# Altium PCB 2018_ACU_LVPWR_rev0.PcbDoc
Units mil, origin at the board's own origin, x right, y up, seen from the top; angles counter-clockwise.
Board outline 7030 x 2760 mil, 2 copper layers (Top Layer, Bottom Layer); 87 components, 73 nets, 303 pads, 254 vias.
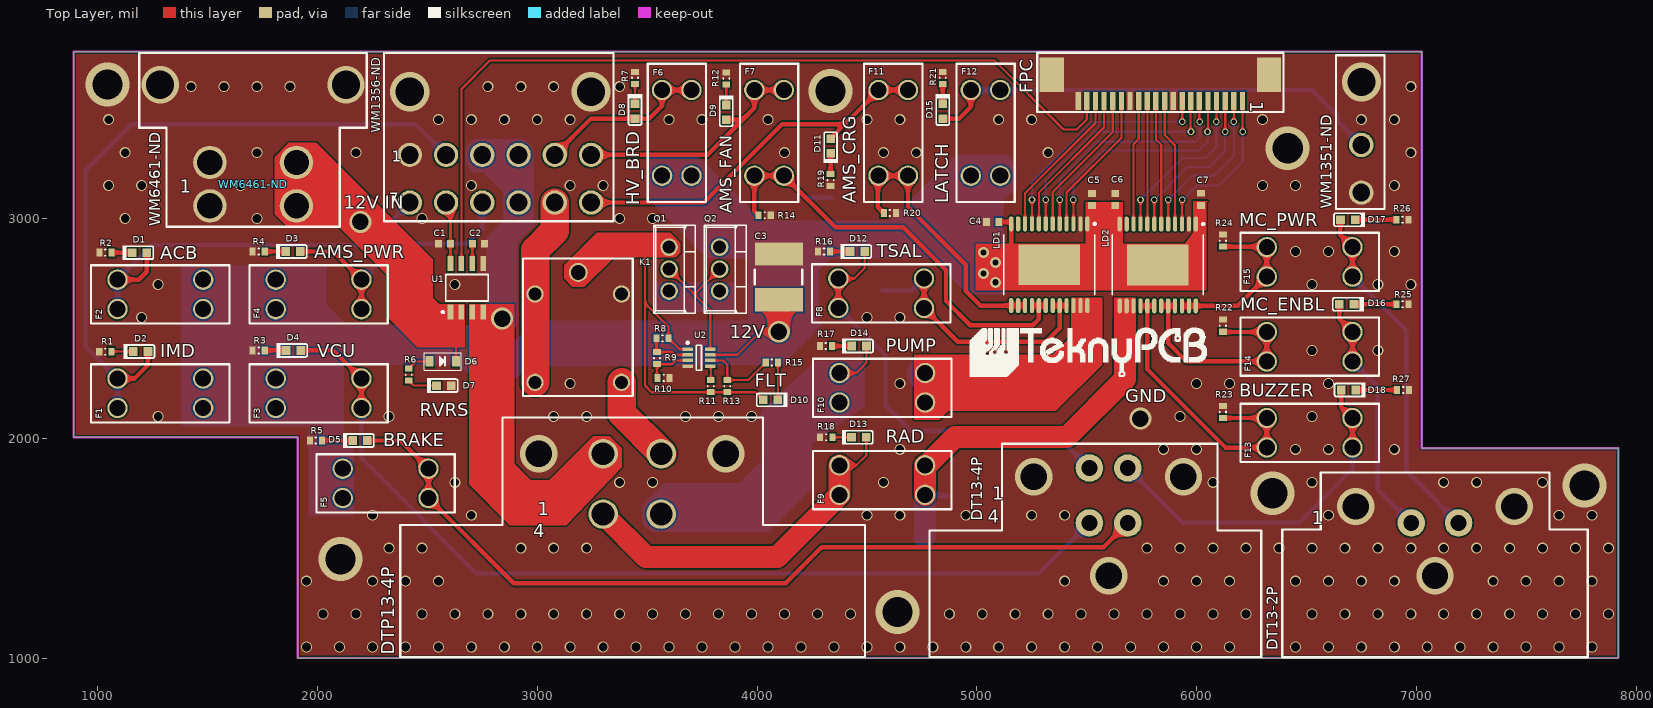
[diagram p0: Top Layer view]
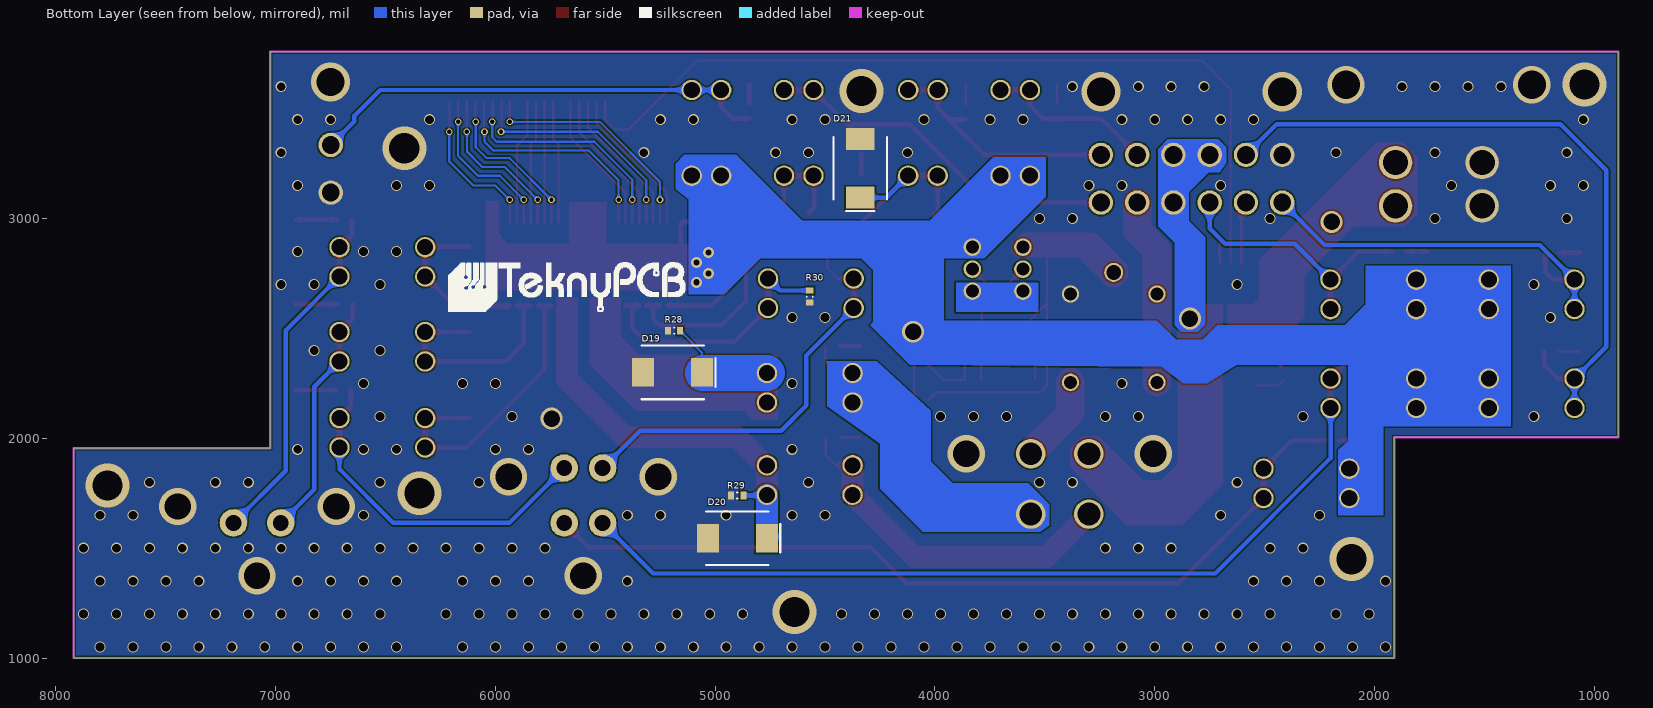
[diagram p1: Bottom Layer view, seen from below]

## Layer stack, top to bottom
Top Solder: solder mask 0.4, Solder Resist, Dk 3.5
Top Layer: signal copper 1.4
Dielectric 1: dielectric 12.6, FR-4, Dk 4.8
Bottom Layer: signal copper 1.4
Bottom Solder: solder mask 0.4, Solder Resist, Dk 3.5

## Board outline
890,3760 7025,3760 7025,1955 7920,1955 7920,1000 1910,1000 1910,2005 890,2005

## Design rules (kind name [scope] priority, off if disabled: settings)
Clearance [All] p1: gap=7
Height [All] p1: minheight=0 maxheight=82934.17 prefheight=500
HoleSize [All] p1: absolutevalues=TRUE maxlimit=200 minlimit=15 maxpercent=80.000 minpercent=20.000
HoleToHoleClearance [All] p1: gap=8 allowstackedmicrovias=TRUE
MinimumAnnularRing MinimumAnnularRing_Pad [IsPad] p1: minimumring=7
MinimumAnnularRing MinimumAnnularRing_Via [IsVia] p2: minimumring=5
MinimumSolderMaskSliver [All] p1: minsoldermaskwidth=4
PlaneClearance [All] p1: clearance=15
PlaneConnect PlaneConnect_12V [InNet('12V')] p1: planeconnectstyle=Direct reliefexpansion=20 reliefentries=4 reliefconductorwidth=20 reliefairgap=10
PlaneConnect PlaneConnect_1 [All] p2: planeconnectstyle=Relief reliefexpansion=15 reliefentries=4 reliefconductorwidth=15 reliefairgap=10
PolygonConnect [All] p1: connectstyle=Direct reliefconductorwidth=15 reliefentries=4 polygonreliefangle="90 Angle" airgapwidth=10
RoutingVias [All] p1: holewidth=17 width=31 viastyle="Through Hole" minholewidth=15 minwidth=29 maxholewidth=50 maxwidth=100
SilkToSilkClearance [All] p1: silktosilkclearance=7
SilkToSolderMaskClearance [IsPad] p1: minsilkscreentomaskgap=2 clearancetoexposedcopper=TRUE
SolderMaskExpansion [All] p1: expansion=3
UnpouredPolygon UnpouredPolygon_1 [All] p2:
Width [All] p1: maxlimit=200 minlimit=7 preferedwidth=15
22 further rules are at their usual default settings.

## Classes and differential pairs
component class Sheet1: DT1 DT2 DT13-2P DT13-4P DTP1 DTP13-4P FPC WM1 WM1351-ND WM1356-ND
component class Sheet2: C2 C5 C6 D1 D2 D10 D17 D19 D20 K1 Q1 Q2 R6 R9 R10 R11 R13 R15 R20 U1 U2
component class Sheet4: C1 C2 C3 C4 D5 D17 D19 D20 D21 LD1 LD2 R5 R12 R14 R20 R22 R23 R25 R29
component class Sheet5: D1 D2 D8 D9 D10 D11 D12 D13 D14 D15 D16 D17 D18 D19 D20 F1 F2 F3 F4 F5 F6 F7 F8 F9 F10 F11 F12 F13 F14 F15 R1 R4 R5 R12 R14 R16 R17 R18 R19 R21 R22 R23 R25 R26 R27

## Components (designator, comment, footprint, x,y, rotation, side; value= is the part's Value field where it differs from the comment)
C1 "Cap Semi" 1608[0603] 2577.44,2885 r0 top (schematic designator C6)
C2 "Cap Semi" 1608[0603] 2732.56,2885 r0 top (schematic designator C5)
C3 "Cap Semi" "2J-LEAD 6.1 X 5.3" 4100,2736.3 r90 top (schematic designator C7)
C4 "Cap Semi" 1608[0603] 5072.44,2985 r0 top (schematic designator C2)
C5 "Cap Semi" 1608[0603] 5525,3087.44 r270 top (schematic designator C1)
C6 "Cap Semi" 1608[0603] 5630,3087.44 r270 top (schematic designator C3)
C7 "Cap Semi" 1608[0603] 6020,3087.56 r270 top (schematic designator C4)
D1 "KP-1608MGC" KING-0603LED_GREEN_V 1190,2845 r0 top (schematic designator DS1)
D2 "KP-1608MGC" KING-0603LED_GREEN_V 1195,2395 r0 top (schematic designator DS5)
D3 "KP-1608MGC" KING-0603LED_GREEN_V 1888.47,2850 r0 top (schematic designator DS7)
D4 "KP-1608MGC" KING-0603LED_GREEN_V 1890,2400 r0 top (schematic designator DS2)
D5 "KP-1608MGC" KING-0603LED_GREEN_V 2193.47,1990 r0 top (schematic designator DS4)
D6 "" SOD-123 2630,2350 r180 top (schematic designator D11)
D7 "RVS PLTY" TOSH-0603LED_RED_V 2575,2240 r0 top (schematic designator D12)
D8 "KP-1608MGC" KING-0603LED_GREEN_V 3445,3488.46 r270 top (schematic designator DS3)
D9 "KP-1608MGC" KING-0603LED_GREEN_V 3860,3483.46 r270 top (schematic designator DS11)
D10 "RVS PLTY" TOSH-0603LED_RED_V 4061.53,2175 r180 top (schematic designator D13)
D11 "KP-1608MGC" KING-0603LED_GREEN_V 4335,3330 r90 top (schematic designator DS9)
D12 "KP-1608MGC" KING-0603LED_GREEN_V 4456.54,2850 r0 top (schematic designator DS8)
D13 "KP-1608MGC" KING-0603LED_GREEN_V 4463.47,2005 r0 top (schematic designator DS14)
D14 "KP-1608MGC" KING-0603LED_GREEN_V 4465,2420 r0 top (schematic designator DS12)
D15 "KP-1608MGC" KING-0603LED_GREEN_V 4845,3488.46 r270 top (schematic designator DS6)
D16 "KP-1608MGC" KING-0603LED_GREEN_V 6683.46,2610 r180 top (schematic designator DS15)
D17 "KP-1608MGC" KING-0603LED_GREEN_V 6688.46,2995 r180 top (schematic designator DS13)
D18 "KP-1608MGC" KING-0603LED_GREEN_V 6691.53,2220 r180 top (schematic designator DS10)
D19 "S8MC-13" S8MC-13 5193.86,2300 r180 bottom (schematic designator D2)
D20 "S8MC-13" S8MC-13 4898.86,1545 r180 bottom (schematic designator D1)
D21 "S8MC-13" S8MC-13 4340,3228.86 r270 bottom (schematic designator D3)
DT13-2P "DT13-2P" DT13-2P 7085,1375 r180 top
DT13-4P "DT13-4P" DT13-4P 5600,1375 r180 top
DTP13-4P "DTP13-4P" DTP13-4P 3432,1655 r180 top
F1 "2A Fuse" "FUSE HOLDER - 3568" 1285,2205 r180 top (schematic designator F5)
F2 "1A Fuse" "FUSE HOLDER - 3568" 1285,2655.12 r180 top (schematic designator F1)
F3 "1A Fuse" "FUSE HOLDER - 3568" 2005,2205 r0 top (schematic designator F2)
F4 "1A Fuse" "FUSE HOLDER - 3568" 2005,2655 r0 top (schematic designator F7)
F5 "2A Fuse" "FUSE HOLDER - 3568" 2310,1795 r0 top (schematic designator F4)
F6 "1A Fuse" "FUSE HOLDER - 3568" 3635,3390 r90 top (schematic designator F3)
F7 "2A Fuse" "FUSE HOLDER - 3568" 4055,3390 r90 top (schematic designator F11)
F8 "2A Fuse" "FUSE HOLDER - 3568" 4565,2660 r180 top
F9 "10A Fuse" "FUSE HOLDER - 3568" 4570,1810 r180 top (schematic designator F14)
F10 "15A Fuse" "FUSE HOLDER - 3568" 4570,2230 r180 top (schematic designator F12)
F11 "1A Fuse" "FUSE HOLDER - 3568" 4620,3390 r90 top (schematic designator F9)
F12 "1A Fuse" "FUSE HOLDER - 3568" 5040,3390 r90 top (schematic designator F6)
F13 "2A Fuse" "FUSE HOLDER - 3568" 6515,2025 r0 top (schematic designator F10)
F14 "1A Fuse" "FUSE HOLDER - 3568" 6515,2417 r0 top (schematic designator F15)
F15 "3A Fuse" "FUSE HOLDER - 3568" 6515,2803 r0 top (schematic designator F13)
FPC "Header 20" A100319CT-ND 5835.4,3535 r180 top
K1 "Relay" "RELAY -   Z2696-ND" 2990,2455.79 r90 top
LD1 "LD - VNQ5050AKTR-E" "24-SOP (0.295\", 7.50MM WIDTH) EXPOSED PAD" 5330,2790 r270 top (schematic designator LD2)
LD2 "LD - VNQ5050AKTR-E" "24-SOP (0.295\", 7.50MM WIDTH) EXPOSED PAD" 5823.74,2788.98 r270 top (schematic designator LD1)
Q1 "" TO220V-GDS 3600,2870 r270 top
Q2 "" TO220V-GDS 3830,2870 r270 top
R1 "560" RESC0603(1608)_L 1034.5,2394 r180 top (schematic designator R20)
R2 "560" RESC0603(1608)_L 1035,2845 r180 top (schematic designator R16)
R3 "560" RESC0603(1608)_L 1732.44,2400 r180 top (schematic designator R17)
R4 "560" RESC0603(1608)_L 1732.44,2850 r180 top (schematic designator R22)
R5 "560" RESC0603(1608)_L 1992.56,1990 r180 top (schematic designator R19)
R6 "430" RESC0603(1608)_L 2415,2290 r90 top (schematic designator R11)
R7 "560" RESC0603(1608)_L 3445,3640 r90 top (schematic designator R18)
R8 "1M" RESC0603(1608)_L 3570,2455 r0 top (schematic designator R9)
R9 "12.4K" RESC0603(1608)_L 3545,2365 r90 top (schematic designator R13)
R10 "30.9K" RESC0603(1608)_L 3575,2275 r180 top (schematic designator R14)
R11 "10K" RESC0603(1608)_L 3790,2237.56 r90 top (schematic designator R15)
R12 "560" RESC0603(1608)_L 3860,3637.56 r90 top (schematic designator R26)
R13 "10K" RESC0603(1608)_L 3865,2237.56 r90 top (schematic designator R10)
R14 "10K" RESC0603(1608)_L 4035,3015 r180 top (schematic designator R7)
R15 "430" RESC0603(1608)_L 4067.44,2345 r0 top (schematic designator R12)
R16 "560" RESC0603(1608)_L 4305,2850 r180 top (schematic designator R23)
R17 "560" RESC0603(1608)_L 4313.47,2420 r180 top (schematic designator R27)
R18 "560" RESC0603(1608)_L 4315,2005 r180 top (schematic designator R29)
R19 "560" RESC0603(1608)_L 4335,3175 r270 top (schematic designator R24)
R20 "10K" RESC0603(1608)_L 4605,3025 r180 top (schematic designator R8)
R21 "560" RESC0603(1608)_L 4845,3640 r90 top
R22 "10K" RESC0603(1608)_L 6120,2512.56 r90 top (schematic designator R2)
R23 "10K" RESC0603(1608)_L 6120,2120 r90 top (schematic designator R3)
R24 "10K" RESC0603(1608)_L 6120,2900 r90 top (schematic designator R1)
R25 "560" RESC0603(1608)_L 6937.44,2610 r0 top (schematic designator R30)
R26 "560" RESC0603(1608)_L 6937.56,2995 r0 top (schematic designator R28)
R27 "560" RESC0603(1608)_L 6940,2220 r0 top (schematic designator R25)
R28 "10K" RESC0603(1608)_L 5187.44,2490 r0 bottom (schematic designator R5)
R29 "10K" RESC0603(1608)_L 4900,1740 r180 bottom (schematic designator R4)
R30 "10K" RESC0603(1608)_L 4570,2645 r270 bottom (schematic designator R6)
U1 "ACS712ELCTR-20A-T" ALEG-LC-8_V 2680,2685 r0 top
U2 "LTC4365ITS8#TRMPBF" LT-TS8-8-TSOT-23_V 3735.87,2367.2 r0 top
WM1351-ND "Header 2" WM1351-ND 6750,3118 r180 top
WM1356-ND "Header 12" WM1356-ND 2832.5,3073 r180 top
WM6461-ND "WM6461-ND" WM6461-ND-B 1904,3058 r180 top

## Footprints (in the part's own frame and the unit in brackets; to place one, negate y for a bottom-side part, rotate by r counter-clockwise, add the part's x,y. Pads: shape width x height; smd on the part's side, far side on the other; paste and mask are expansions set on the pad)
"2J-LEAD 6.1 X 5.3" [mm]
  rect 2.7x5.6 smd: 1(-2.7,0) 2(2.6,0)
  silkscreen extent -0.9,-2.7 0.8,2.8, body extent -3.4,-2.8 3.3,2.8, height 5
"24-SOP (0.295\", 7.50MM WIDTH) EXPOSED PAD" [mm] "VNQ5050KTR-E"
  oval 1.75x0.5 smd: 1(-4.725,4.4) 2(-4.725,3.6) 3(-4.725,2.8) 4(-4.725,2) 5(-4.725,1.2) 6(-4.725,0.4) 7(-4.725,-0.4) 8(-4.725,-1.2) 9(-4.725,-2) 10(-4.725,-2.8) 11(-4.725,-3.6) 12(-4.725,-4.4) 13(4.725,-4.4) 14(4.725,-3.6) 15(4.725,-2.8) 16(4.725,-2) 17(4.725,-1.2) 18(4.725,-0.4) 19(4.725,0.4) 20(4.725,1.2) 21(4.725,2) 22(4.725,2.8) 23(4.725,3.6) 24(4.725,4.4)
  rect 4.7x7.1 smd: 25(0,0)
  silkscreen extent -4.85,-5.25 3.45,5.38, body extent -3.8,-5.25 3.8,5.25, height 2.45
1608[0603] [mm] "Chip Capacitor, Body 1.6x0.8mm, IPC High Density"
  rect 0.8x0.9 smd: 1(-0.7,0) 2(0.7,0)
  body extent -0.87,-0.48 0.87,0.48, height 1.3
A100319CT-ND [mil]
  rect 24x82.68 smd: 1(-374.02,0)
  rect 24x80 smd: 2(-334.65,0) 3(-295.28,0) 4(-255.91,0) 5(-216.54,0) 6(-177.17,0) 7(-137.8,0) 8(-99.6,0) 9(-59.06,0) 10(-19.69,0) 11(20.4,0) 12(59.06,0) 13(98.43,0) 14(137.8,0) 15(177.17,0) 16(216.54,0) 17(255.91,0) 18(295.28,0) 19(334.65,0) 20(374.02,0)
  rect 110.24x157.48 smd: 20(-494.09,-120.08) 20(494.09,-120.08)
  silkscreen extent -560,-220 560,50, body extent -550,-226 550,32, height 100
ALEG-LC-8_V [mm] "SOIC, 8-Leads, Body 4.9x3.9mm, Pitch 1.27mm"
  rect 0.65x1.75 smd: 1(-1.905,-2.8) 2(-0.635,-2.8) 3(0.635,-2.8) 4(1.905,-2.8) 5(1.905,2.8) 6(0.635,2.8) 7(-0.635,2.8) 8(-1.905,2.8)
  silkscreen extent -2.9,-2.92 2.45,1.53, body extent -2.45,-1.95 2.45,1.95, height 1.75
DT13-2P [mil]
  round 125 hole 72: 1(107.5,-240) 2(-107.5,-240)
  silkscreen extent -695,-470 695,371, body extent -695,-475 695,945, height 1090
DT13-4P [mil]
  round 125 hole 72: 1(87.5,-490) 2(-87.5,-490) 3(-87.5,-240) 4(87.5,-240)
  silkscreen extent -695,-600 815,370, body extent -700,-607 810,947, height 1394
DTP13-4P [mil]
  round 134 hole 104: 1(132,-275) 2(-132,-275) 3(-132,0) 4(132,0)
  silkscreen extent -1060,-440 1055,650, body extent -1070,-440 1060,1397, height 1419
"FUSE HOLDER - 3568" [mil]
  round 93 hole 73: 1(-195,-67) 1(-195,67) 2(195,-67) 2(195,67)
  silkscreen extent -315,-133 315,133, body extent -317,-130 313,135, height 290
KING-0603LED_GREEN_V [mm] "SMT LED, 2-Leads, Body 1.6x0.8mm (0603-Size)"
  rect 1x1 smd paste+0 mask+0: 1(0.85,0) 2(-0.85,0)
  silkscreen extent -1.97,-0.85 1.6,0.85, body extent -0.92,-0.53 1.09,0.53, height 1.1
LT-TS8-8-TSOT-23_V [mm] "SOT23, 8-Leads, Body 2.9x1.75mm, Pitch 0.65mm"
  rect 1.22x0.4 smd mask+0: 1(-1.31,0.975) 2(-1.31,0.325) 3(-1.31,-0.325) 4(-1.31,-0.975) 5(1.31,-0.975) 6(1.31,-0.325) 7(1.31,0.325) 8(1.31,0.975)
  silkscreen extent -1.43,-1.45 0.3,1.85, body extent -0.87,-1.45 0.88,1.45, height 1
"RELAY -   Z2696-ND" [mm]
  round 2.2 hole 1.7: 1(7.6,-5)
  round 2 hole 1.5: 2(5.1,0) 3(-5.1,0) 4(-5.1,-10) 5(5.1,-10)
  silkscreen extent -6.7,-11.3 9.2,1.4
RESC0603(1608)_L [mm]
  rect 0.7x0.9 smd: 1(-0.7,0) 2(0.7,0)
  silkscreen extent -0.05,-0.35 0.05,0.35, body extent -0.85,-0.47 0.85,0.47, height 0.6
S8MC-13 [mil]
  rect 100x130 smd: 1(-133.86,0) 2(133.86,0)
  silkscreen extent -142,-122 195,122
SOD-123 [mm]
  rect 0.9x1.2 smd: A(3.048,0) K(0,0)
  silkscreen extent -0.64,-1.02 3.68,1.02, body extent -0.18,-0.87 3.3,0.87, height 0.79
TO220V-GDS [mil]
  round 80 hole 60: 1(100,0) 2(0,0) 3(200,0)
  silkscreen extent -100,-70 300,120, body extent -100,-70 300,120, height 920
TOSH-0603LED_RED_V [mm] "SMT LED, 2-Leads, Body 1.6x0.8mm (0603-Size)"
  rect 1x1 smd paste+0 mask+0: 1(0.85,0) 2(-0.85,0)
  silkscreen extent -1.97,-0.85 1.6,0.85, body extent -0.92,-0.53 1.09,0.53, height 0.6
WM1351-ND [mil]
  round 111 hole 81: 1(0,-217) 2(0,0)
  silkscreen extent -105,-625 115,75, body extent -108,-767 120,17, height 449
WM1356-ND [mil]
  round 111 hole 81: 1(412.5,-217) 2(247.5,-217) 3(82.5,-217) 4(-82.5,-217) 5(-247.5,-217) 6(-412.5,-217) 7(412.5,0) 8(247.5,0) 9(82.5,0) 10(-82.5,0) 11(-247.5,0) 12(-412.5,0)
  silkscreen extent -515,-680 530,85, body extent -520,-765 535,20, height 449
WM6461-ND-B [mil]
  round 152 hole 115: 1(394,-197) 1(394,0) 2(0,0) 2(0,-197)
  silkscreen extent -320,-695 715,95, body extent -274,-1081 664,65, height 555

## Part data
C1 C2 C3 C4 C5 C6 C7: "Capacitor (Semiconductor SIM Model)"
D1 D2 D3 D4 D5 D8 D9 D11 D12 D13 D14 D15 D16 D17 D18: library part CMP-0404-00001-1, "LED, SMT, 0603(1608), 1.1mm thickness, Green"
D6: library part "Diode 1N4003", "1 Amp General Purpose Rectifier"
D7 D10: library part CMP-0444-00001-1, "LED, Red 0603 (1608) 63mCd"
D19 D20 D21: library part Diode, "Default Diode"
DT13-2P WM6461-ND: library part "Header 2", "Header, 2-Pin"
DT13-4P DTP13-4P: library part "Header 4", "Header, 4-Pin"
F1 F2 F3 F4 F5 F6 F7 F8 F9 F10 F11 F12 F13 F14 F15: library part "Fuse 1", "Fuse"
FPC: "Header, 20-Pin"
K1: "SPDT Relay"
LD1 LD2: library part "LOAD DRIVER - VNQ5050"
Q1 Q2: library part CMP-1058-00860-1, "Power MOSFET, 40 V, 167 A, Single N-Channel, 3-Pin TO-220, Pb-Free, Tube"
R1 R2 R3 R4 R5 R6 R7 R8 R9 R10 R11 R12 R13 R14 R15 R16 R17 R18 R19 R20 R21 R22 R23 R24 R25 R26 R27 R28 R29 R30: library part CMP-1591-00001-1, "0603 (1608 Metric) Chip Resistor"
U1: library part CMP-0826-00001-1, "Linear Current Sensor IC, 4.5 to 5.5 V Supply Voltage, 10 mA Supply Current, -40 to 85 degC, 8-Pin SOIC (LC), RoHS, Tape and Reel"
U2: library part CMP-0474-00861-1, "UV, OV and Reverse Supply Protection Controller, 2.5 to 34 V Vin, 8-pin SOT23 (TS8-8), -40 to 85 degC, Pb-Free, Mini Tape and Reel"
WM1351-ND: "Header, 2-Pin"
WM1356-ND: "Header, 12-Pin"

## Via types
v1: diameter 50, hole 40, Top Layer to Bottom Layer, 210 vias
v2: diameter 30, hole 20, Top Layer to Bottom Layer, 16 vias
v3: diameter 170, hole 120, Top Layer to Bottom Layer, 8 vias
v4: diameter 200, hole 137, Top Layer to Bottom Layer, 7 vias
v5: diameter 50, hole 28, Top Layer to Bottom Layer, 4 vias
v6: diameter 100, hole 75, Top Layer to Bottom Layer, 4 vias
v7: diameter 178, hole 128, Top Layer to Bottom Layer, 3 vias
v8: diameter 170, hole 128, Top Layer to Bottom Layer, 2 vias

## Nets (pads, with @x,y where several pads share a name; then routed paths per layer and width w, separated by ;. In a path a pad name is that pad's centre, name@x,y a point inside that pad or via, vN(x,y) a via of type N, cw(c..) or ccw(c..) an arc to the next point about the centre after c; other vN are vias at no path point)
5V: C1.2 U1.8 WM1356-ND.8 | length 286
  Top Layer w12: WM1356-ND.8 2605,3053 C1.2 U1.8
12V: C3.1 C4.2 C5.2 C6.2 C7.2 F1.1 F2.1 F3.1 F4.1 F5.1 F6.1 F12.1 LD1.1 LD1.12 LD1.25 LD2.1 LD2.12 LD2.25 Q2.2 U2.7 | length 665.8
  Top Layer w10: U2.7 3910,2380 4015,2485 v6(4100,2485)
  Top Layer w20: C4.2 5147.8,2985 LD1.12 5156.77,2871.77
  Top Layer w100: v6(4100,2485) C3.1
  other v5: 5085,2710 5030,2750 5085,2800 5030,2845
12V_FROM_MS: DTP13-4P.2 K1.4 | length 401.8
  Top Layer w130: K1.4 3383.7,2115.3 DTP13-4P.2@3569,1930
12V_IN: D6.K U1.1 U1.2 WM6461-ND.2 | length 139.1
  Top Layer w10: U1.1 U1.1@2615,2564.76 ; D6.K 2630,2475
  other v6: 2195,2985
12V_INTERMEDIATE: D10.1 K1.1 Q1.2 R8.2 R11.1 R13.1 U2.1 | length 1520.9
  Top Layer w10: 3500,2880 3490,2870 3490,2615 ; U2.1 3646.97,2405.59 R8.2 3597.56,2507.44 3490,2615 ; D10.1 3993.07,2210 R13.1 R11.1 3520,2210 3490,2240 3490,2615
12V_TO_MS: DTP13-4P.1 U1.3 U1.4 WM1356-ND.3 WM1356-ND.4 WM1356-ND.10
  other v6: 2840,2545
ACB_POWER: D1.1 F2.2 WM1356-ND.7 | length 1844.4
  Top Layer w20: F2.2@1090,2722.12 1187.12,2722.12 1223.46,2758.46 D1.1
  Bottom Layer w20: F2.2@1090,2588.12 1090,2722.12 1247.88,2880 2227,2880 WM1356-ND.7
ACCUMULATOR_FAN: D21.2 F7.1 LD1.16 LD1.17 LD1.18 R14.2 | length 2241.6
  Top Layer w20: R14.2 3988,3034.44 3988,3195 4122,3195 4357,2960 4665,2960 4860,2765 4860,2625 4970,2515 5255,2515 5282.76,2542.76 LD1.17 ; LD1.16 LD1.17 ; LD1.18 LD1.17
  Bottom Layer w20: F7.1@4122,3195 4222,3095 D21.2
ACCUMULATOR_FAN_CONTROL: FPC.7 LD1.7 | length 1093.6
  Top Layer w10: LD1.7 v2@5314.25,3084.25 ; v2@5973.2,3391.8 FPC.7
  Bottom Layer w10: v2@5314.25,3084.25 v2(5314.25,3085) 5314.25,3174.25 5535,3395 v2(5975,3395)
ACCUMULATOR_FAN_FEEDBACK: FPC.17 LD1.8 | length 681.9
  Top Layer w10: LD1.8 5282.76,3117.76 5579.49,3414.49 FPC.17
AMS_CHARGE_POWER: F11.1 LD1.13 LD1.14 LD1.15 R20.2 | length 1249.4
  Top Layer w20: R20.2 4550,3052.44 4550,3195 4553,3195 4687,3195 4687,3053 4950,2790 4950,2670 5016.02,2603.98 LD1.13 LD1.14 LD1.15
AMS_CHARGE_POWER_CONTROL: FPC.8 LD1.9 | length 1082.4
  Top Layer w10: LD1.9 v2@5251.26,3083.74 ; v2(5935,3440) FPC.8
  Bottom Layer w10: v2@5251.26,3083.74 v2(5251.26,3085) 5251.26,3166.26 5525,3440 v2(5935,3440)
AMS_CHARGE_POWER_FEEDBACK: FPC.18 LD1.10 | length 691.7
  Top Layer w10: LD1.10 5219.76,3114.76 5540.12,3435.12 FPC.18
AMS_CHARGE_POWER_OUT: D11.1 F11.2 WM1356-ND.12 | length 1751
  Top Layer w20: WM1356-ND.12 3758,3073 4115,3430 4401,3430 ; D11.1 4335,3364 4401,3430 ; F11.2@4690,3585 4687,3585 4556,3585 4401,3430
AMS_FANS: D9.1 F7.2 WM1356-ND.6 | length 1122.2
  Top Layer w20: WM1356-ND.6 3775,3290 3935,3450 ; D9.1 3935,3450 ; F7.2@4122,3585 3988,3585 3988,3503 3935,3450
AMS_POWER: D3.1 F4.2 WM1356-ND.9 | length 1229.6
  Top Layer w20: D3.1 2072,2850 2200,2722 F4.2@2200,2588
  Bottom Layer w20: F4.2@2200,2722 2363,2885 2680,2885 2750,2955 WM1356-ND.9
BRAKE_OUT: D5.1 DT13-4P.3 F5.2 | length 3922.2
  Top Layer w20: D5.1 2377,1990 2505,1862 2505,1728 2893,1340 4130,1340 4295,1505 5577.5,1505 DT13-4P.3
BUZZER: F13.1 LD2.16 LD2.17 LD2.18 R23.1 | length 1362.8
  Top Layer w20: LD2.16 LD2.17 ; LD2.18 LD2.17 ; R23.1 F13.1@6305.56,2092.44 ; F13.1@6320,2092 6320,1958 6132,1958 5776.5,2313.5 LD2.17
BUZZER_CONTROL: FPC.3 LD2.7 | length 757.5
  Top Layer w10: LD2.7 v2@5807.99,3082.01 ; v2@6130.68,3390.68 FPC.3
  Bottom Layer w10: v2@5807.99,3082.01 v2(5807.99,3085) 5957.99,3235 6060,3235 6130,3305 v2(6130,3395)
BUZZER_FEEDBACK: FPC.12 LD2.8 | length 560.1
  Top Layer w10: FPC.12 5776.34,2975.15 LD2.8
BUZZER_OUT: D18.1 DT13-4P.2 F13.2 | length 1611
  Top Layer w20: D18.1 6658.07,2141.93 F13.2@6710,2090 ; F13.2@6710,1958 F13.2@6710,2090 ; F13.2@6710,2092 F13.2@6710,2090
  Bottom Layer w20: DT13-4P.2 5937.5,1615 6465,1615 6710,1860 F13.2@6710,1958
CURR_SENS: FPC.19 U1.7 | length 3928
  Top Layer w10: U1.7 2655,3590 2785,3720 5080,3720 5395,3405 5455,3405 5500.75,3450.75 FPC.19
FAULT: R13.2 R15.1 U2.6 | length 363.5
  Top Layer w10: U2.6 3845.59,2354.41 3865,2335 R13.2 3960,2265.12 R15.1
GATE: Q1.1 Q2.1 U2.8 | length 605.5
  Top Layer w10: Q1.1 3715,2655 ; U2.8 3787.44,2582.56 3715,2655 ; Q2.1 3715,2655
  Top Layer w12: U2.8 U2.8@3788.03,2405
GND: C1.1 C2.2 C3.2 C4.1 C5.1 C6.1 C7.1 D7.1 D19.1 D20.1 D21.1 FPC.9 FPC.14 FPC.20 K1.5 LD1.2 LD2.2 R1.2 R2.2 R3.2 R4.2 R5.2 R7.2 R10.1 R12.2 R14.1 R16.2 R17.2 R18.2 R19.2 R20.1 R21.2 R22.2 R23.2 R24.2 R25.2 R26.2 R27.2 R28.2 R29.1 R30.2 U1.5 U2.4 WM1351-ND.2 WM1356-ND.1 WM6461-ND.1
  other v1: 1950,1050 2100,1050 2250,1050 2400,1050 2550,1050 2700,1050 2850,1050 3000,1050 3150,1050 3300,1050 3450,1050 3600,1050 3750,1050 3900,1050 4050,1050 4200,1050 4350,1050 4500,1050 4650,1050 4800,1050 4950,1050 5100,1050 5250,1050 5400,1050 5550,1050 5700,1050 5850,1050 6000,1050 6150,1050 6450,1050 6600,1050 6750,1050 6900,1050 7050,1050 7200,1050 7350,1050 7500,1050 7650,1050 7800,1050 2025,1200 2175,1200 2475,1200 2625,1200 2775,1200 2925,1200 3075,1200 3225,1200 3375,1200 3525,1200 3675,1200 3825,1200 3975,1200 4125,1200 4275,1200 4425,1200 4875,1200 5025,1200 5175,1200 5325,1200 5475,1200 5625,1200 5775,1200 5925,1200 6075,1200 6225,1200 6525,1200 6675,1200 6825,1200 6975,1200 7125,1200 7275,1200 7425,1200 7575,1200 7725,1200 7875,1200 1950,1350 2250,1350 2400,1350 2550,1350 5400,1350 5850,1350 6000,1350 6150,1350 6450,1350 6600,1350 6750,1350 6900,1350 7350,1350 7500,1350 7650,1350 7800,1350 2325,1500 2475,1500 2925,1500 3075,1500 3225,1500 5775,1500 5925,1500 6075,1500 6225,1500 6375,1500 6525,1500 6675,1500 6825,1500 6975,1500 7125,1500 7275,1500 7425,1500 7575,1500 7725,1500 7875,1500 2250,1650 2700,1650 4500,1650 4650,1650 4950,1650 5250,1650 5400,1650 6600,1650 7650,1650 7800,1650 2625,1800 3375,1800 3525,1800 4575,1800 6075,1800 6525,1800 7125,1800 7275,1800 7575,1800 4650,1950 5850,1950 6000,1950 6450,1950 6600,1950 6900,1950 1275,2100 2325,2100 3075,2100 3225,2100 3675,2100 3825,2100 3975,2100 5925,2100 6525,2100 3150,2250 4650,2250 6000,2250 6150,2250 6600,2250 6525,2400 6825,2400 1200,2550 4500,2550 4650,2550 1275,2700 2625,2700 6525,2700 6825,2700 6975,2700 6450,2850 6600,2850 6900,2850 1125,3000 1725,3000 2475,3000 3375,3000 3525,3000 1050,3150 1200,3150 1650,3150 2700,3150 3150,3150 3300,3150 6300,3150 6450,3150 6900,3150 1125,3300 1725,3300 2175,3300 4125,3300 4575,3300 4725,3300 5325,3300 6975,3300 1050,3450 2550,3450 2700,3450 2850,3450 3000,3450 3150,3450 3600,3450 3750,3450 4050,3450 4500,3450 4650,3450 5100,3450 5250,3450 6300,3450 6750,3450 6900,3450 1425,3600 1575,3600 1725,3600 1875,3600 2775,3600 2925,3600 3075,3600 3375,3600 6975,3600
  other v3: 5600,1375 7085,1375 6724.5,1690 7445.5,1690 5259.5,1825 5940.5,1825 3007,1930 3857,1930
  other v4: 4640,1210 2105,1450 6345,1750 7765,1785 6415,3320 4335,3580 1045,3610
  other v6: 5745,2090
  other v7: 2420,3577 3245,3577 6750,3622
  other v8: 1284,3609 2130,3609
HV_BOARD_POWER: D8.1 F6.2 WM1356-ND.5 | length 786.4
  Top Layer w20: WM1356-ND.5 3245,3455 D8.1 3510,3455 3568,3513 3568,3585 F6.2@3702,3585
IMD_POWER: D2.1 F1.2 WM1356-ND.2 | length 3152.5
  Top Layer w20: F1.2@1090,2272 1167,2272 1228.46,2333.46 D2.1
  Bottom Layer w20: F1.2@1090,2138 1090,2272 945,2417 945,3220 1155,3430 2445,3430 WM1356-ND.2
LATCHING_POWER: D15.1 F12.2 WM1351-ND.1 | length 2121.8
  Top Layer w20: D15.1 4920,3455 4973,3508 F12.2@4973,3585
  Bottom Layer w20: F12.2@4973,3585 5107,3585 6524.4,3585 6642,3467.4 6642,3443 WM1351-ND.1
LV_CHARGE_POWER: K1.2 K1.3 WM1356-ND.11 | length 855.3
  Top Layer w130: K1.3 K1.2 2990,2855 3080,2945 WM1356-ND.11
MC_ENABLE: F14.1 LD2.19 LD2.20 LD2.21 R22.1 | length 1050.2
  Top Layer w20: LD2.19 LD2.20 ; LD2.21 LD2.20 ; R22.1 6121,2484 6320,2484 6320,2350 5955,2350 5870.98,2434.02 LD2.20
MC_ENABLE_CONTROL: FPC.2 LD2.5 | length 746.8
  Top Layer w10: LD2.5 v2@5870.98,3084.02 ; v2@6170.05,3435.05 FPC.2
  Bottom Layer w10: v2@5870.98,3084.02 v2(5870.98,3085) 5980.98,3195 6080,3195 6170,3285 v2(6170,3440)
MC_ENABLE_FEEDBACK: FPC.11 LD2.6 | length 570.1
  Top Layer w10: FPC.11 5815,3360 5839.49,3335.51 LD2.6
MC_ENBL_OUT: D16.1 DT13-2P.1 F14.2 | length 1130.7
  Top Layer w20: D16.1 6650,2544 6710,2484 F14.2@6710,2350
  Bottom Layer w20: F14.2@6710,2350 6825,2235 6825,1767.5 DT13-2P.1
MC_POWER: F15.1 LD2.22 LD2.23 LD2.24 R24.1 | length 776.1
  Top Layer w20: LD2.22 LD2.23 LD2.24 6186.95,2602.95 6320,2736 6320,2870 6317.56,2872.44 R24.1
MC_POWER_CONTROL: FPC.1 LD2.3 | length 737.9
  Top Layer w10: LD2.3 v2@5933.98,3086.02 ; v2@6209.42,3390.58 FPC.1
  Bottom Layer w10: v2(5935,3085) 6000,3150 6100,3150 6210,3260 v2(6210,3395)
MC_POWER_FEEDBACK: FPC.10 LD2.4 | length 579.6
  Top Layer w10: FPC.10 5855.09,3379.91 5902.48,3332.52 LD2.4
MC_PWR_OUT: D17.1 DT13-2P.2 F15.2 | length 1602.6
  Top Layer w20: D17.1 6655,2925 6710,2870 F15.2@6710,2736
  Bottom Layer w20: F15.2@6710,2736 6955,2491 6955,1852.5 DT13-2P.2
NetC5_1: C2.1 U1.6 | length 89.8
  Top Layer w12: U1.6 C2.1
NetD11_A: D6.A R6.2 | length 108.4
  Top Layer w10: R6.2 2447.44,2350 D6.A
NetD12_2: D7.2 R6.1 | length 135.8
  Top Layer w10: R6.1 2437.44,2240 D7.2
NetD13_2: D10.2 R15.2 | length 170
  Top Layer w10: D10.2 R15.2
NetDS1_2: D1.2 R2.1 | length 94
  Top Layer w20: R2.1 D1.2
NetDS2_2: D4.2 R3.1 | length 96.5
  Top Layer w20: R3.1 D4.2
NetDS3_2: D8.2 R7.1 | length 90.5
  Top Layer w10: D8.2 R7.1
NetDS4_2: D5.2 R5.1 | length 139.9
  Top Layer w20: R5.1 D5.2
NetDS5_2: D2.2 R1.1 | length 99.9
  Top Layer w10: R1.1 1063.06,2395 D2.2
NetDS6_2: D15.2 R21.1 | length 90.5
  Top Layer w20: D15.2 R21.1
NetDS7_2: D3.2 R4.1 | length 95
  Top Layer w20: R4.1 D3.2
NetDS8_2: D12.2 R16.1 | length 90.5
  Top Layer w20: R16.1 D12.2
NetDS9_2: D11.2 R19.1 | length 94
  Top Layer w20: R19.1 D11.2
NetDS10_2: D18.2 R27.1 | length 187.4
  Top Layer w20: D18.2 R27.1
NetDS11_2: D9.2 R12.1 | length 93.1
  Top Layer w10: D9.2 R12.1
NetDS12_2: D14.2 R17.1 | length 90.5
  Top Layer w20: R17.1 D14.2
NetDS13_2: D17.2 R26.1 | length 188.1
  Top Layer w20: D17.2 R26.1
NetDS14_2: D13.2 R18.1 | length 87.4
  Top Layer w10: R18.1 D13.2
NetDS15_2: D16.2 R25.1 | length 193
  Top Layer w20: D16.2 R25.1
NetQ1_3: Q1.3 Q2.3
OV: R9.1 R10.2 U2.3 | length 209.8
  Top Layer w10: R10.2 3545,2277.44 R9.1 3612.44,2337.44 3629.41,2354.41 U2.3
PUMP: D19.2 F10.1 LD1.22 LD1.23 LD1.24 R28.1 | length 527.6
  Bottom Layer w10: D19.2@5057,2297 D19.2 5060,2390.12 R28.1
  Bottom Layer w163: F10.1@4765,2297 D19.2@5057,2297
PUMP_CONTROL: FPC.5 LD1.3 | length 1069.3
  Top Layer w10: LD1.3 v2@5440.24,3084.76 ; v2@6051.94,3391.94 FPC.5
  Bottom Layer w10: v2(5440,3085) 5440,3175 5575,3310 6010,3310 6050,3350 v2(6050,3395)
PUMP_FEEDBACK: FPC.15 LD1.4 | length 662.3
  Top Layer w10: LD1.4 5408.74,3118.74 5658.23,3368.23 FPC.15
PUMP_OUT: D14.1 DTP13-4P.3 F10.2 | length 219.2
  Top Layer w10: F10.2@4375,2297 4452,2297 4498.46,2343.46 D14.1
RAD: D20.2 F9.1 LD2.13 LD2.14 LD2.15 R29.2 | length 1790.5
  Top Layer w100: F9.1@4765,1743 4765,1877 4772,1877 4900,2005 5410,2005 5675,2270 5675,2550
  Bottom Layer w10: F9.1@4765,1743 F9.1@4768,1740
  Bottom Layer w20: F9.1@4768,1740 R29.2
  Bottom Layer w100: D20.2@4760,1550 4765,1555 F9.1@4765,1743
RAD_CONTROL: FPC.4 LD2.9 | length 763.1
  Top Layer w10: LD2.9 v2(5745,3085) ; v2@6091.31,3441.31 FPC.4
  Bottom Layer w10: v2(5745,3085) 5935,3275 6040,3275 6090,3325 v2(6090,3440)
RAD_FEEDBACK: FPC.13 LD2.10 | length 569.7
  Top Layer w10: LD2.10 5713.5,3338.5 5736.97,3361.97 FPC.13
RAD_OUT: D13.1 DTP13-4P.4 F9.2 | length 1629.7
  Top Layer w10: F9.2@4375,1877 4452,1877 4496.93,1921.93 D13.1
  Top Layer w100: DTP13-4P.4@3298,1648 3307,1648 3495,1460 4092,1460 4375,1743 F9.2@4375,1877
SHDN: R11.2 U2.5 | length 64.8
  Top Layer w10: U2.5 3790,2326.26 R11.2
TSAL: F8.1 LD1.19 LD1.20 LD1.21 R30.1 | length 1217.7
  Top Layer w20: F8.1@4760,2727 4760,2593 4913,2440 5315,2440 5377.24,2502.24 LD1.20 ; LD1.19 LD1.20 ; LD1.21 LD1.20
  Bottom Layer w20: R30.1 4705.56,2672.56 F8.1@4760,2727
TSAL_CONTROL: FPC.6 LD1.5 | length 1081.3
  Top Layer w10: LD1.5 v2@5377.24,3082.76 ; v2@6012.57,3442.57 FPC.6
  Bottom Layer w10: v2@5377.24,3082.76 v2(5377.24,3085) 5377.24,3177.24 5550,3350 5995,3350 6015,3370 v2(6015,3440)
TSAL_FEEDBACK: FPC.16 LD1.6 | length 672.1
  Top Layer w10: LD1.6 5345.75,3120.75 5618.86,3393.86 FPC.16
TSAL_OUT: D12.1 DT13-4P.1 F8.2 | length 1939.5
  Top Layer w10: F8.2@4370,2727 4442,2727 4490,2775 D12.1
  Top Layer w20: F8.2@4370,2593 F8.2@4370,2727
  Bottom Layer w20: F8.2@4370,2580 4370,2593 4585,2378 4585,2150 4700,2035 5342.5,2035 DT13-4P.1
UV: R8.1 R9.2 U2.2 | length 208
  Top Layer w12: R8.1 3542.44,2395.12 R9.2 3612.44,2392.56 3625,2380 U2.2
VCU_POWER_OUT: D4.1 DT13-4P.4 F3.2 | length 4316.8
  Top Layer w20: D4.1 2072,2400 2200,2272 F3.2@2200,2138
  Bottom Layer w20: F3.2@2200,2138 2200,1910 2725,1385 5282.5,1385 DT13-4P.4
pads on no net: LD1.11 LD2.11

## Polygon pours and split planes (outlines as drawn)
GND on Bottom Layer "GND" (solid, pour order 6): 890,3760 890,2005 1910,2005 1910,1000 7920,1000 7920,1955 7025,1955 7025,3760
GND on Top Layer "GND" (solid, pour order 4): 890,3760 890,2005 1910,2005 1910,1000 7920,1000 7920,1955 7025,1955 7025,3760

## Keep-outs
Keep-Out Layer:
  the board outline again, w10

## Other copper
Top Layer:
  rectangle net 12V: 5495,2885 5665,3075
  rectangle net RAD: 5625,2520 5725,2640
  region net 12V: 4995,2675 6045,2675 6045,3075 6050,3080 5985,3080 5985,2935 5946.11,2885 4995,2885
  region net PUMP: 5430,2640 5430,2465 5345,2380 4715,2380 4715,2085 4830,2085 4870,2125 5360,2125 5570,2335 5570,2640
  region net 12V_IN: 2670,2610 2555,2610 2525,2640 2525,2815 1995,3345 1870,3345 1805,3280 1805,3020 1860,2965 2095,2965 2320,2740 2320,2550 2455,2415 2670,2415
  region net 12V_TO_MS: 2895,2610 2895,1885 2970,1810 3055,1810 3255,2010 3330,2010 3385,1955 3385,1869.42 3131.26,1605 2875,1605 2690,1790 2690,2610
  region net 12V_INTERMEDIATE: 3605,2935 3650,2890 3650,2845 3630,2825 3350,2825 3215,2690 3160,2690 3122.5,2727.5 3122.5,2787.5 3270,2935
Bottom Layer:
  rectangle net NetQ1_3: 3530,2575 3905,2710
  region net 12V: 1380,2785 1380,2055 1960,2055 1960,1650 2165,1650 2165,1947.24 2120,1986.03 2120,2335 2627.86,2335 2761.43,2250 2870.79,2250 2969.11,2324.72 4115,2335 4295,2515 4280,2530 4280,2765 4335,2820 4795,2820 4960,2655 5120,2655 5120,2900 5120,3088.75 5180,3133.75 5180,3250 5140,3290 4905,3290 4605,2990 4025,2990 3735,3280 3495,3280 3495,3100 3775,2820 3960,2820 3960,2535 2990,2535 2902.5,2447.5 2782.5,2447.5 2715,2515 2135,2515 2040,2610 2040,2785
  region net 12V_TO_MS: 2675,3325 2710,3360 2940,3360 2985,3315 2985,2965 2910,2890 2910,2515 2880,2485 2805,2485 2770,2520 2770,2915 2845,2990 2845,3120 2755,3210 2705,3210 2675,3255
  region net PUMP_OUT: 4265,2350 4495,2350 4490,2345 4490,2145 4250,1975 4250,1770 4055,1575 3521.74,1575 3480,1603.8 3480,1700 3575,1795 3920,1795 4020,1895 4020,2125.85

## Silkscreen, mask and mechanical layers (free items; w line width, h text height)
Top Overlay:
  drawing of 2446 lines, arcs and shapes, not listed
  text "AMS_CRG" at 4450,3070 h60 r90
  text "LATCH" at 4870,3070 h60 r90
  text "HV_BRD" at 3465,3060 h60 r90
  text "12V IN" at 2120,3045 h60
  text "AMS_FAN" at 3885,3025 h55 r90
  text "MC_PWR" at 6195,2965 h60
  text "TSAL" at 4545,2825 h60
  text "AMS_PWR" at 1985,2820 h60
  text "ACB" at 1285,2815 h60
  text "MC_ENBL" at 6200,2580 h60
  text "12V" at 3875,2455 h60
  text "PUMP" at 4585,2395 h60
  text "IMD" at 1285,2370 h60
  text "VCU" at 2000,2370 h60
  text "FLT" at 3990,2235 h60
  text "BUZZER" at 6195,2190 h60
  text "GND" at 5675,2165 h60
  text "RVRS" at 2465,2100 h60
  text "RAD" at 4585,1980 h60
  text "BRAKE" at 2300,1965 h60
Bottom Overlay:
  drawing of 2446 lines, arcs and shapes, not listed

## Text inside footprints (layer, text, board x,y; h text height)
DT13-2P: Top Overlay "1" at 6525,1610 h60
DT13-4P: Top Overlay "4" at 5050,1615 h60; Top Overlay "1" at 5070,1720 h60
DTP13-4P: Top Overlay "4" at 2982,1550 h60; Top Overlay "1" at 3002,1650 h60
FPC: Top Overlay "1" at 6245.4,3535 h60 r270
WM1356-ND: Top Overlay "7" at 2327.5,3068 h50; Top Overlay "1" at 2337.5,3258 h50
WM6461-ND: Top Overlay "1" at 1374,3118 h60